# Altium PCB Motherboard.PcbDoc
Units mil, origin at the board's own origin, x right, y up, seen from the top; angles counter-clockwise.
Board outline 6000 x 4000 mil, 2 copper layers (Top Layer, Bottom Layer); 38 components, 20 nets, 132 pads, 0 vias.
Unrouted connection lines stored in the file: 51.
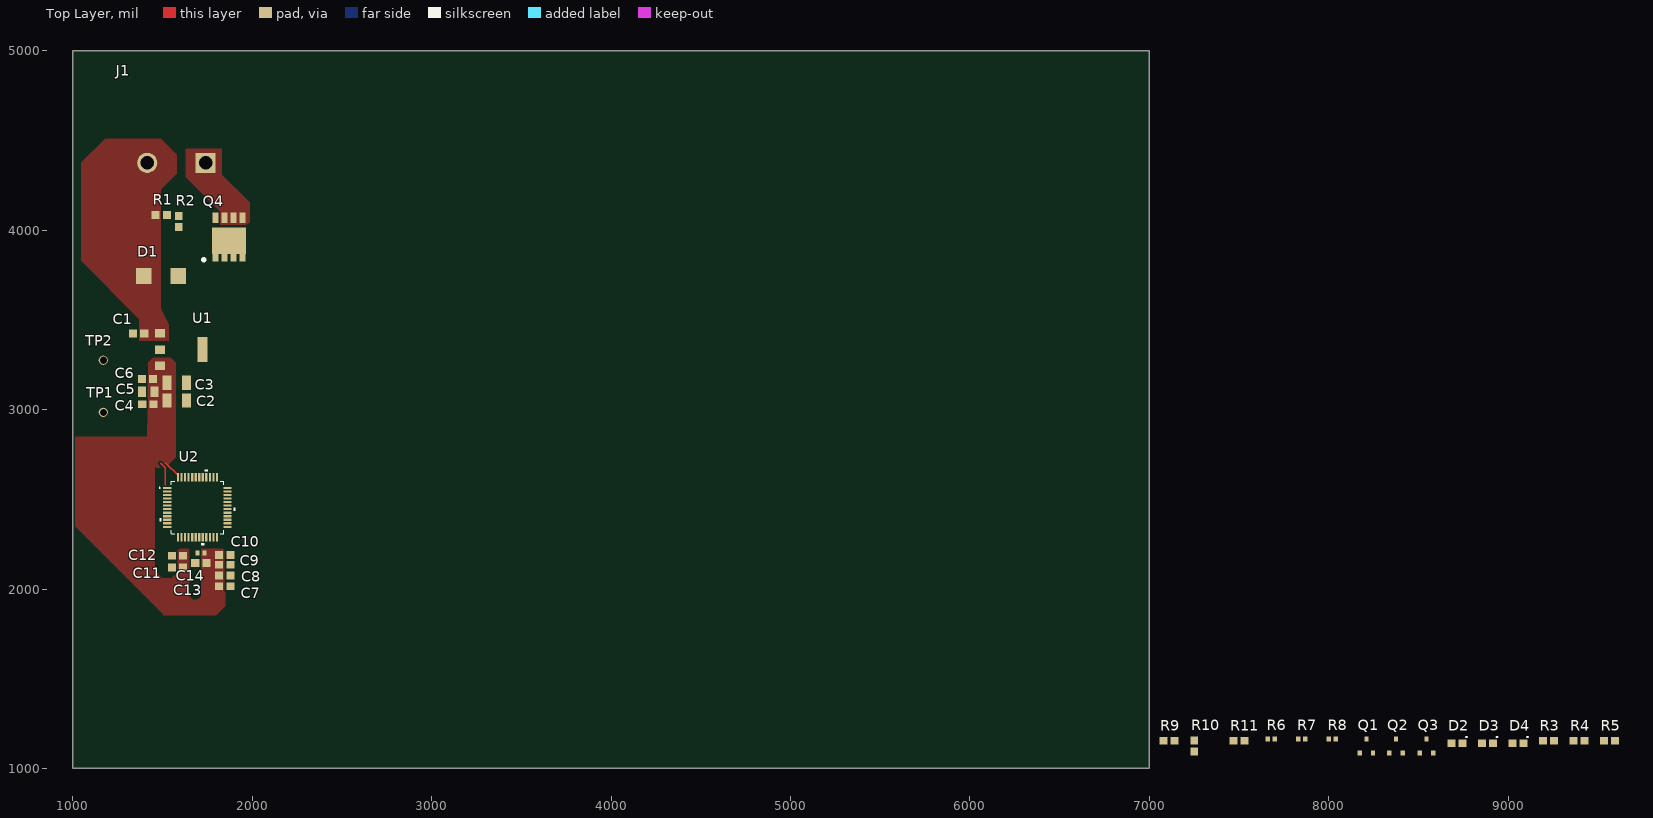
[diagram p0: Top Layer view]
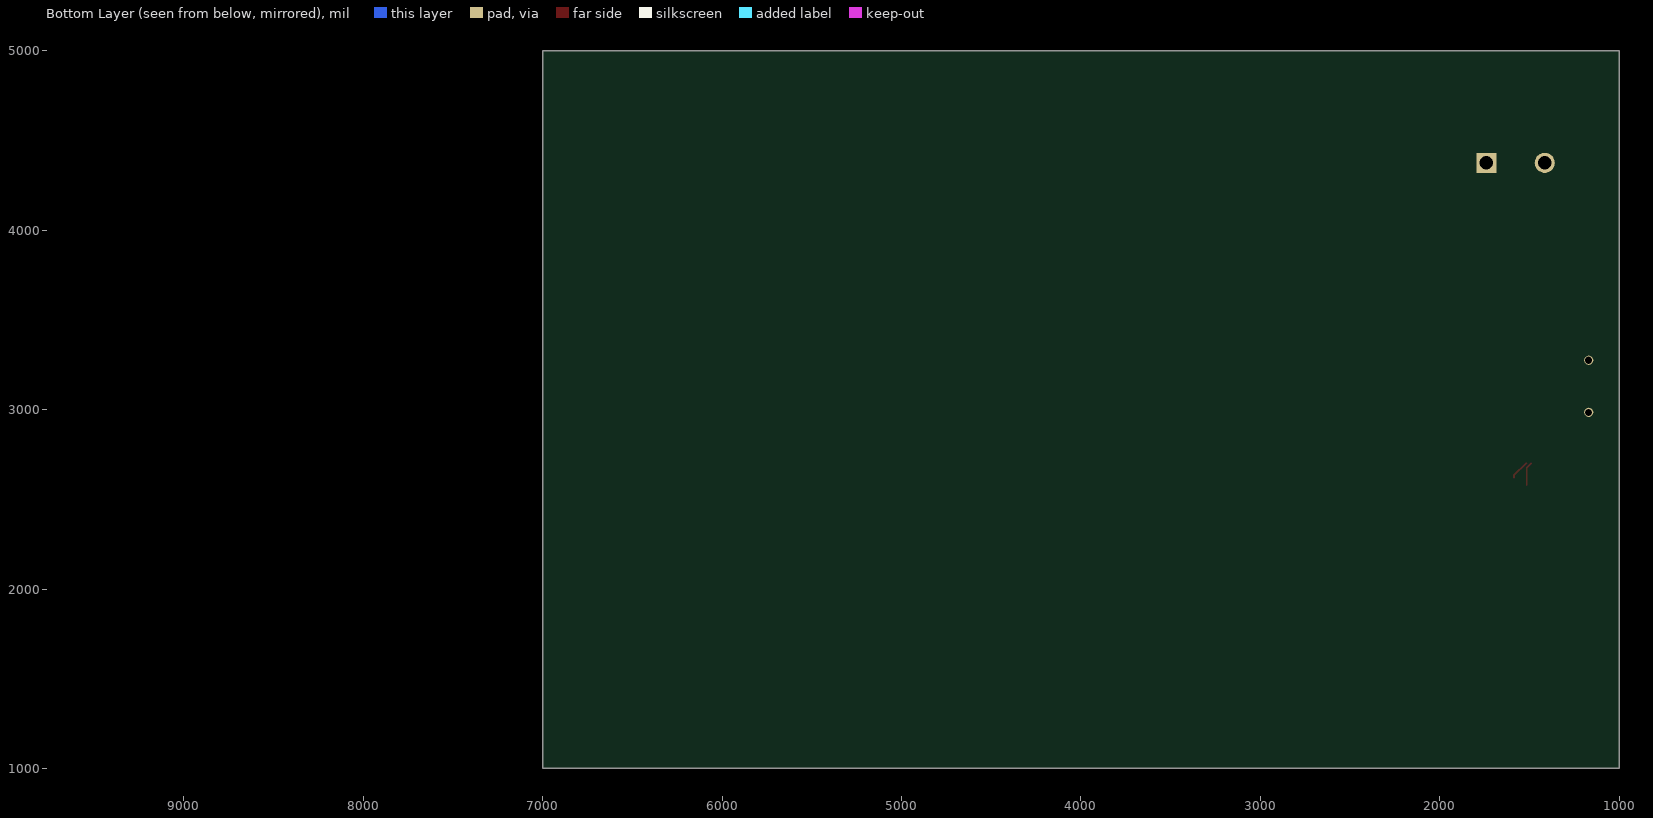
[diagram p1: Bottom Layer view, seen from below]

## Layer stack, top to bottom
Top Solder: solder mask 0.4, Solder Resist, Dk 3.5
Top Layer: signal copper 1.4
Dielectric 1: dielectric 12.6, FR-4, Dk 4.8
Bottom Layer: signal copper 1.4
Bottom Solder: solder mask 0.4, Solder Resist, Dk 3.5

## Board outline
1000,1000 7000,1000 7000,5000 1000,5000

## Design rules (kind name [scope] priority, off if disabled: settings)
Clearance [All] p1: gap=10 ignorepadtopadclearanceinfootprint=FALSE except(0: Arc-Hole Track-Hole SMDPad-Hole THPad-Hole Via-Hole Fill-Hole Poly-Hole Region-Hole Text-Hole)
PolygonConnect [All] p1: connectstyle=Direct reliefconductorwidth=10 reliefentries=4 polygonreliefangle="90 Angle" airgapwidth=10
RoutingVias [All] p1: holewidth=28 width=50 viastyle="Through Hole" minholewidth=28 minwidth=50 maxholewidth=28 maxwidth=50
SolderMaskExpansion [All] p1: expansion=4 istentingtop=FALSE
Width [All] p1: maxlimit=10 minlimit=10 preferedwidth=10
30 further rules are at their usual default settings.

## Classes and differential pairs
component class Motherboard: C1 C2 C3 C4 C5 C6 C7 C8 C9 C10 C11 C12 C13 C14 C? D1 D? J1 J? P? Q4 Q? R1 R2 R? TP1 TP2 TP? U1 U2 U?
component class Daughtercard: D2 D3 D4 D? Q1 Q2 Q3 Q? R3 R4 R5 R6 R7 R8 R9 R10 R11 R? X?

## Components (designator, comment, footprint, x,y, rotation, side; value= is the part's Value field where it differs from the comment)
C1 "CGA3E3X7R1H334K080AB" CAP-0603 1366.5,3425 r180 top
C2 "CL31B106KBHNNNE" CAP-1206 1580,3050 r0 top
C3 "CL31B106KBHNNNE" CAP-1206 1580,3150 r0 top
C4 "UMK107AB7105KA-T" CAP-0603 1418.5,3030 r180 top
C5 "KAM21KR72A474KL" CAP-0805 1420.35,3100 r0 top
C6 "CC0603KRX7R0BB104" CAP-0603 1416.5,3170 r180 top
C7 "TMK107BBJ475KA-T" CAP-0603 1846.5,2015 r0 top
C8 "CC0603KRX7R0BB104" CAP-0603 1846.5,2075 r0 top
C9 "CC0603KRX7R0BB104" CAP-0603 1846.5,2135 r0 top
C10 "CC0603KRX7R0BB104" CAP-0603 1846.5,2190 r0 top
C11 "UMK107AB7105KA-T" CAP-0603 1583.5,2120 r180 top
C12 "CC0603KRX7R0BB104" CAP-0603 1583.5,2185 r180 top
C13 "UMK107AB7105KA-T" CAP-0603 1714.13,2145 r180 top
C14 "CC0402KRX7R0BB103" CAP-0402 1714.68,2200 r180 top
D1 "SMBJE43CAH" "DO-214AA (SMBJ)" 1490,3745 r0 top
D2 "150060AS75000" LED-0603 8715,1140 r0 top
D3 "150060AS75000" LED-0603 8885,1140 r0 top
D4 "150060AS75000" LED-0603 9055,1140 r0 top
J1 "1546927-2" CONN-1546927-2 1577.5,4375 r270 top
Q1 "T2N7002AK,LM" NMOS-SOT23-3 8210,1125 r0 top
Q2 "T2N7002AK,LM" NMOS-SOT23-3 8375,1125 r0 top
Q3 "T2N7002AK,LM" NMOS-SOT23-3 8545,1125 r0 top
Q4 "TPH7R006PL,L1Q" NMOS-8PowerVDFN 1795,3850 r0 top
R1 "ERJ-3EKF2003V" RES-0603 1493.5,4085 r0 top
R2 "RC0603FR-07100KL" RES-0603 1590,4048.5 r90 top
R3 "AC0603FR-10100RL" RES-0603 9225,1155 r0 top
R4 "AC0603FR-10100RL" RES-0603 9395,1155 r0 top
R5 "AC0603FR-10100RL" RES-0603 9565,1155 r0 top
R6 "ERJ2RKF33R0X" RES-0402 7680,1165 r0 top
R7 "ERJ2RKF33R0X" RES-0402 7850,1165 r0 top
R8 "ERJ2RKF33R0X" RES-0402 8020,1165 r0 top
R9 "RC0603FR-0710KP" RES-0603 7110,1155 r0 top
R10 "RC0603FR-0710KP" RES-0603 7250,1125 r90 top
R11 "RC0603FR-0710KP" RES-0603 7500,1155 r0 top
TP1 "5003" TEST-POINT-0001 1170,2985 r0 top
TP2 "5003" TEST-POINT-0001 1170,3275 r0 top
U1 "UA78M33CDCYR" IC-SOT-223-4 1605,3335 r0 top
U2 "STM32G431CBT6" LQFP48-7x7mm 1695,2455 r0 top

## Footprints (in the part's own frame and the unit in brackets; to place one, negate y for a bottom-side part, rotate by r counter-clockwise, add the part's x,y. Pads: shape width x height; smd on the part's side, far side on the other; paste and mask are expansions set on the pad)
CAP-0402 [mm]
  rect 0.6x0.7 smd: 1(-0.5,0) 2(0.5,0)
  body extent -0.5,-0.22 0.5,0.23, height 0.5
CAP-0603 [mm]
  rect 1.15x1.1 smd: 1(-0.8,0) 2(0.8,0)
  body extent -0.8,-0.45 0.8,0.45, height 0.8
CAP-0805 [mm]
  rect 1.16x1.47 smd: 1(-0.88,0) 2(0.88,0)
  body extent -1,-0.63 1,0.63, height 0.94
CAP-1206 [mm]
  rect 1.25x2 smd: 1(-1.375,0) 2(1.375,0)
  body extent -1.6,-0.8 1.6,0.8, height 1.5
CONN-1546927-2 [mm]
  rect 2.85x2.85 hole 1.9: 1(0,4.127)
  round 2.85 hole 1.9: 2(0,-4.127)
  body extent -11.57,-8.85 4.49,8.85, height 14.99
"DO-214AA (SMBJ)" [mm]
  rect 2.16x2.26 smd: 1(-2.416,0) 2(2.484,0)
  body extent -2.72,-1.95 2.78,1.95, height 2.45
IC-SOT-223-4 [mm]
  rect 1.4x1.2 smd mask+0.07: 1(-3,2.3) 2(-3,0) 3(-3,-2.3)
  rect 1.4x3.5 smd: 2(3,0)
  body extent -3.5,-3.25 3.5,3.25, height 1.68
LED-0603 [mm]
  rect 1.15x1.1 smd: 1(-0.8,0) 2(0.8,0)
  silkscreen extent 1.27,0.89 1.4,0.89, body extent -0.8,-0.3 0.8,0.3, height 1
LQFP48-7x7mm [mil]
  rect 47x12 smd paste+0 mask+0: 1(-167.32,108.27) 2(-167.32,88.58) 3(-167.32,68.9) 4(-167.32,49.21) 5(-167.32,29.53) 6(-167.32,9.84) 7(-167.32,-9.84) 8(-167.32,-29.53) 9(-167.32,-49.21) 10(-167.32,-68.9) 11(-167.32,-88.58) 12(-167.32,-108.27) 25(167.32,-108.27) 26(167.32,-88.58) 27(167.32,-68.9) 28(167.32,-49.21) 29(167.32,-29.53) 30(167.32,-9.84) 31(167.32,9.84) 32(167.32,29.53) 33(167.32,49.21) 34(167.32,68.9) 35(167.32,88.58) 36(167.32,108.27)
  rect 12x47 smd paste+0 mask+0: 13(-108.27,-167.32) 14(-88.58,-167.32) 15(-68.9,-167.32) 16(-49.21,-167.32) 17(-29.53,-167.32) 18(-9.84,-167.32) 19(9.84,-167.32) 20(29.53,-167.32) 21(49.21,-167.32) 22(68.9,-167.32) 23(88.58,-167.32) 24(108.27,-167.32) 37(108.27,167.32) 38(88.58,167.32) 39(68.9,167.32) 40(49.21,167.32) 41(29.53,167.32) 42(9.84,167.32) 43(-9.84,167.32) 44(-29.53,167.32) 45(-49.21,167.32) 46(-68.9,167.32) 47(-88.58,167.32) 48(-108.27,167.32)
  silkscreen extent -214,-211 211,211, body extent -177,-177 177,177, height 63
NMOS-8PowerVDFN [mm]
  rect 0.85x1.45 smd: 1(0,5.588) 2(1.27,5.588) 2(2.54,5.588) 2(3.81,5.588)
  rect 0.85x1.05 smd: 3(0,-0.112) 3(1.27,-0.112) 3(2.54,-0.112) 3(3.81,-0.112)
  rect 4.8x3.75 smd: 3(1.905,2.286)
  silkscreen extent -1.91,-0.64 -1.4,-0.13
NMOS-SOT23-3 [mm]
  rect 0.6x0.7 smd: 1(-0.95,-1) 2(0.95,-1) 3(0,1)
  body extent -1.46,-1.18 1.46,1.19, height 1.12
RES-0402 [mm]
  rect 0.6x0.7 smd: 1(-0.5,0) 2(0.5,0)
  body extent -0.5,-0.25 0.5,0.25, height 0.3
RES-0603 [mm]
  rect 1.15x1.1 smd: 1(-0.8,0) 2(0.8,0)
  body extent -0.8,-0.4 0.8,0.4, height 0.43
TEST-POINT-0001 [mm] "2024 miniature test point"
  round 1.3 hole 1: 1(0,0)
  body extent -1.27,-1.27 1.27,1.27, height 4.57

## Part data
C1: library part CAP-0.33uF-0001, "0.33 µF ±10% 50V Ceramic Capacitor X7R 0603 (1608 Metric)", Capacitance="0.33 uF", Manufacturer="TDK Corporation", Temperature Coefficient=X7R, Tolerance="+/- 10%", Voltage=50V, Manufacturer Part Number=CGA3E3X7R1H334K080AB
C2 C3: library part CAP-10U-0001, "10 µF ±10% 50V Ceramic Capacitor X7R 1206 (3216 Metric)", Capacitance="10uF +/-20%", Manufacturer="Samsung Electro-Mechanics", Package Size=1206, Temperature Coefficient=X7R, Voltage Rating=50V, Assembled?=no, Manufacturer Part Number=CL31B106KBHNNNE
C4 C11 C13: library part CAP-1U-0002, "1 µF ±10% 50V Ceramic Capacitor X7R 0603 (1608 Metric)", Capacitance="1 uF", Package Size=0603, Voltage=50V
C5: library part CAP-0.47U-0001, "0.47 µF ±10% 100V Ceramic Capacitor X7R 0805 (2012 Metric)", Capacitance="0.47 uF", Package Size=0805, Temperature Coefficient=X7R, Tolerance="+/- 10%", Voltage=100V, Assembled?=No
C6 C8 C9 C10 C12: library part CAP-100N-0001, "CAP CER 0.1UF 100V X7R 0603", Capacitance="100nF +/-10%", Manufacturer=YAGEO, Package Size=0603, Temperature Coefficient=X7R, Voltage Rating=100V, Assembled?=no, Manufacturer Part Number=CC0603KRX7R0BB104
C7: library part CAP-4.7U-0001, "4.7 µF ±10% 25V Ceramic Capacitor X5R 0603 (1608 Metric)", Capacitance="4.7uF +/-10%", Manufacturer="Taiyo Yuden", Package Size=0603, Temperature Coefficient=X5R, Voltage Rating=25V, Assembled?=no, Manufacturer Part Number=TMK107BBJ475KA-T
C14: library part CAP-10N-0001, "10000 pF ±10% 100V Ceramic Capacitor X7R 0402 (1005 Metric)", Capacitance="10nF +/-10%", Manufacturer=YAGEO, Package Size=0402, Temperature Coefficient=X7R, Voltage Rating=100V, Assembled?=no, Manufacturer Part Number=CC0402KRX7R0BB103
D1: library part DIO-69.4V-0001, "69.4V Clamp 8.7A Ipp Tvs Diode Surface Mount DO-214AA (SMBJ)", Breakdown Voltage=47.8V, Package="DO-214AA (SMBJ)", Peak pulser current=8.7A, Reverse working maximum voltage=43V, Channels=Bidirectional, Vclamp=69.4V
D2 D3 D4: library part LED_Amber_0001, "CAP CER 0.1UF 100V X7R 0603", Color=Amber, Current Rating=20mA, Manufacturer="Wurth Electronik", Package Size=0603, Assembled?=no, Manufacturer Part Number=150060AS75000, Vf=2V
J1: library part CON-2POS-0003
Q1 Q2 Q3: library part NMOS-200MA-0001, "MOSFET N-CH 60V 200MA SOT23", Manufacturer=Toshiba, Package=SOT-23-3, Assembled?=no, FET type=N-Channel, Id-Continuous=200mA, Manufacturer Part Number=T2N7002AK,LM, Rds On-Max=3.9Ohm, VDS-Max=60V, Vgs-Max=20V
Q4: library part NMOS-60A-0001, "N-Channel 60 V 60A (Tc) 81W (Tc) Surface Mount 8-SOP Advance (5x5)", Drain Current=60A, Package=8-PowerVDFN, Vdss=60V, Vgs="2.5V @ 220uA", Vgs(Max)=20V
R1: library part RES-200K-0001, "200 kOhms ±1% 0.1W, 1/10W Chip Resistor 0603 (1608 Metric) Automotive AEC-Q200 Thick Film", Manufacturer="Panasonic Electronic Components", Package Size=0603, Power Rating="0.1 W", Resistance="200k +/- 1%", Assembled?=Yes, MFP=ERJ-3EKF2003V
R2: library part RES-100K-0003, "100 kOhms ±1% 0.1W, 1/10W Chip Resistor 0603 (1608 Metric) Moisture Resistant Thick Film", Package Size=0603, Power="1/10 W", Resistance="100 kOhm", Tolerance="+/- 1%", Assembled?=No
R3 R4 R5: library part RES-100-0002, "100 Ohms ±1% 0.1W, 1/10W Chip Resistor 0603 (1608 Metric) Automotive AEC-Q200 Thick Film", Manufacturer=YAGEO, Package Size=0603, Power Rating=1/10W, Resistance="100Ohm +/-1%", Assembled?=no, Manufacturer Part Number=AC0603FR-10100RL
R6 R7 R8: library part RES-33-0003-JLC, "100mW Thick Film Resistors ±100ppm/℃ ±1% -55℃~+155℃ 33Ω 0402  Chip Resistor - Surface Mount ROHS", JLC part number=C278594, Power="1/10 W", Resistance="33 Ohm +/- 1%", Assembled?=yes
R9 R10 R11: library part RES-10K-0002, "RES SMD 10K OHM 1% 1/10W 0603", Manufacturer=YAGEO, Package Size=0603, Power Rating=1/10W, Resistance="10kOhm +/-1%", Assembled?=no, Manufacturer Part Number=RC0603FR-0710KP
TP1 TP2: library part TEST-POINT-0001, "Oranange PC Test Point, Miniature Phoisphor Bronze Silver Plating Through Hole Mounting Type"
U1: library part IC-LDO-3.3V-0002, "Linear Voltage Regulator IC Positive Fixed 1 Output 500mA SOT-223-4", Current="500 mA", Package=SOT-223-4, Vin=25V, Vout=3.3V
U2: library part IC-STM32G431CBT6-0001, "ARM® Cortex®-M4F STM32G4 Microcontroller IC 32-Bit Single-Core 170MHz 128KB (128K x 8) FLASH 48-LQFP (7x7)"

## Nets (pads, with @x,y where several pads share a name; then routed paths per layer and width w, separated by ;. In a path a pad name is that pad's centre, name@x,y a point inside that pad or via, vN(x,y) a via of type N, cw(c..) or ccw(c..) an arc to the next point about the centre after c; other vN are vias at no path point)
Debug_LED_0: R6.1
DEBUG_LED_1: R7.1
Debug_LED_2: R8.1
GND: C1.2 C7.2 C8.2 C9.2 C10.2 C11.2 C12.2 C13.2 C14.2 D1.2 Q1.2 Q2.2 Q3.2 Q4.3 R2.1 R9.2 R10.2 R11.2 U1.2 U2.19 U2.23 U2.35 U2.47
NetC2_2: C2.2 C3.2 C4.2 C5.1 C6.2 TP1.1
NetD2_1: D2.1 R3.2
NetD2_2: D2.2 Q1.3
NetD3_1: D3.1 R4.2
NetD3_2: D3.2 Q2.3
NetD4_1: D4.1 R5.2
NetD4_2: D4.2 Q3.3
NetJ1_1: J1.1 Q4.2
NetQ1_1: Q1.1 R6.2 R9.1
NetQ2_1: Q2.1 R7.2 R10.1
NetQ3_1: Q3.1 R8.2 R11.1
NetQ4_1: Q4.1 R1.2 R2.2
SWCLK: U2.38
SWDIO: U2.37
VBAT: C1.1 D1.1 J1.2 R1.1 U1.1
VBAT_MCU: C2.1 C3.1 C4.1 C5.2 C6.1 C7.1 C8.1 C9.1 C10.1 C11.1 C12.1 C13.1 C14.1 R3.1 R4.1 R5.1 TP2.1 U1.3 U2.1 U2.20 U2.21 U2.24 U2.36 U2.48 | length 109.4
  Top Layer w10: 1516.64,2701.64 1518.36,2701.64 1586.73,2633.27 U2.48
pads on no net: U2.2 U2.3 U2.4 U2.5 U2.6 U2.7 U2.8 U2.9 U2.10 U2.11 U2.12 U2.13 U2.14 U2.15 U2.16 U2.17 U2.18 U2.22 U2.25 U2.26 U2.27 U2.28 U2.29 U2.30 U2.31 U2.32 U2.33 U2.34 U2.39 U2.40 U2.41 U2.42 U2.43 U2.44 U2.45 U2.46
copper on no net: | length 130.4
  Top Layer w10: 1490,2700 1515,2675 1515,2580

## Polygon pours and split planes (outlines as drawn)
NetJ1_1 on Top Layer "NETJ1_1_L01_P007" (solid, pour order 7): 1980,4040 1985,4045 1985,4155 1830,4310 1830,4455 1635,4455 1630,4450 1630,4295 1820,4105 1820,4030 1965,4030
VBAT_MCU on Top Layer "VBAT_MCU_L01_P002" (solid, pour order 2): 1645,2225 1650,2220 1650,1960 1670,1940 1695,1940 1715,1960 1715,2225 1835,2225 1850,2210 1850,1905 1800,1855 1505,1855 1505,1860 1015,2350 1015,2850 1416.18,2849.99 1420,3255 1420,3265 1445,3290 1545,3290 1575,3260 1575,2735 1515,2675 1465,2675 1457.5,2682.5 1457.5,2107.5 1453.75,2103.75 1497.5,2060 1550,2060 1585,2095 1585,2215 1595,2225
VBAT on Top Layer "VBAT_L01_P001" (solid, pour order 1): 1490,4225 1580,4315 1580,4420 1490,4510 1181.32,4510 1047.5,4380 1047.5,3830 1370,3505 1370,3385 1535,3385 1535,3475 1490,3565